# Altium PCB PCB1.PcbDoc
Units mm, origin at the board's own origin, x right, y up, seen from the top; angles counter-clockwise.
Board outline 62.23 x 101.6 mm, 2 copper layers (Top Layer, Bottom Layer); 56 components, 41 nets, 145 pads, 0 vias.
Unrouted connection lines stored in the file: 98.
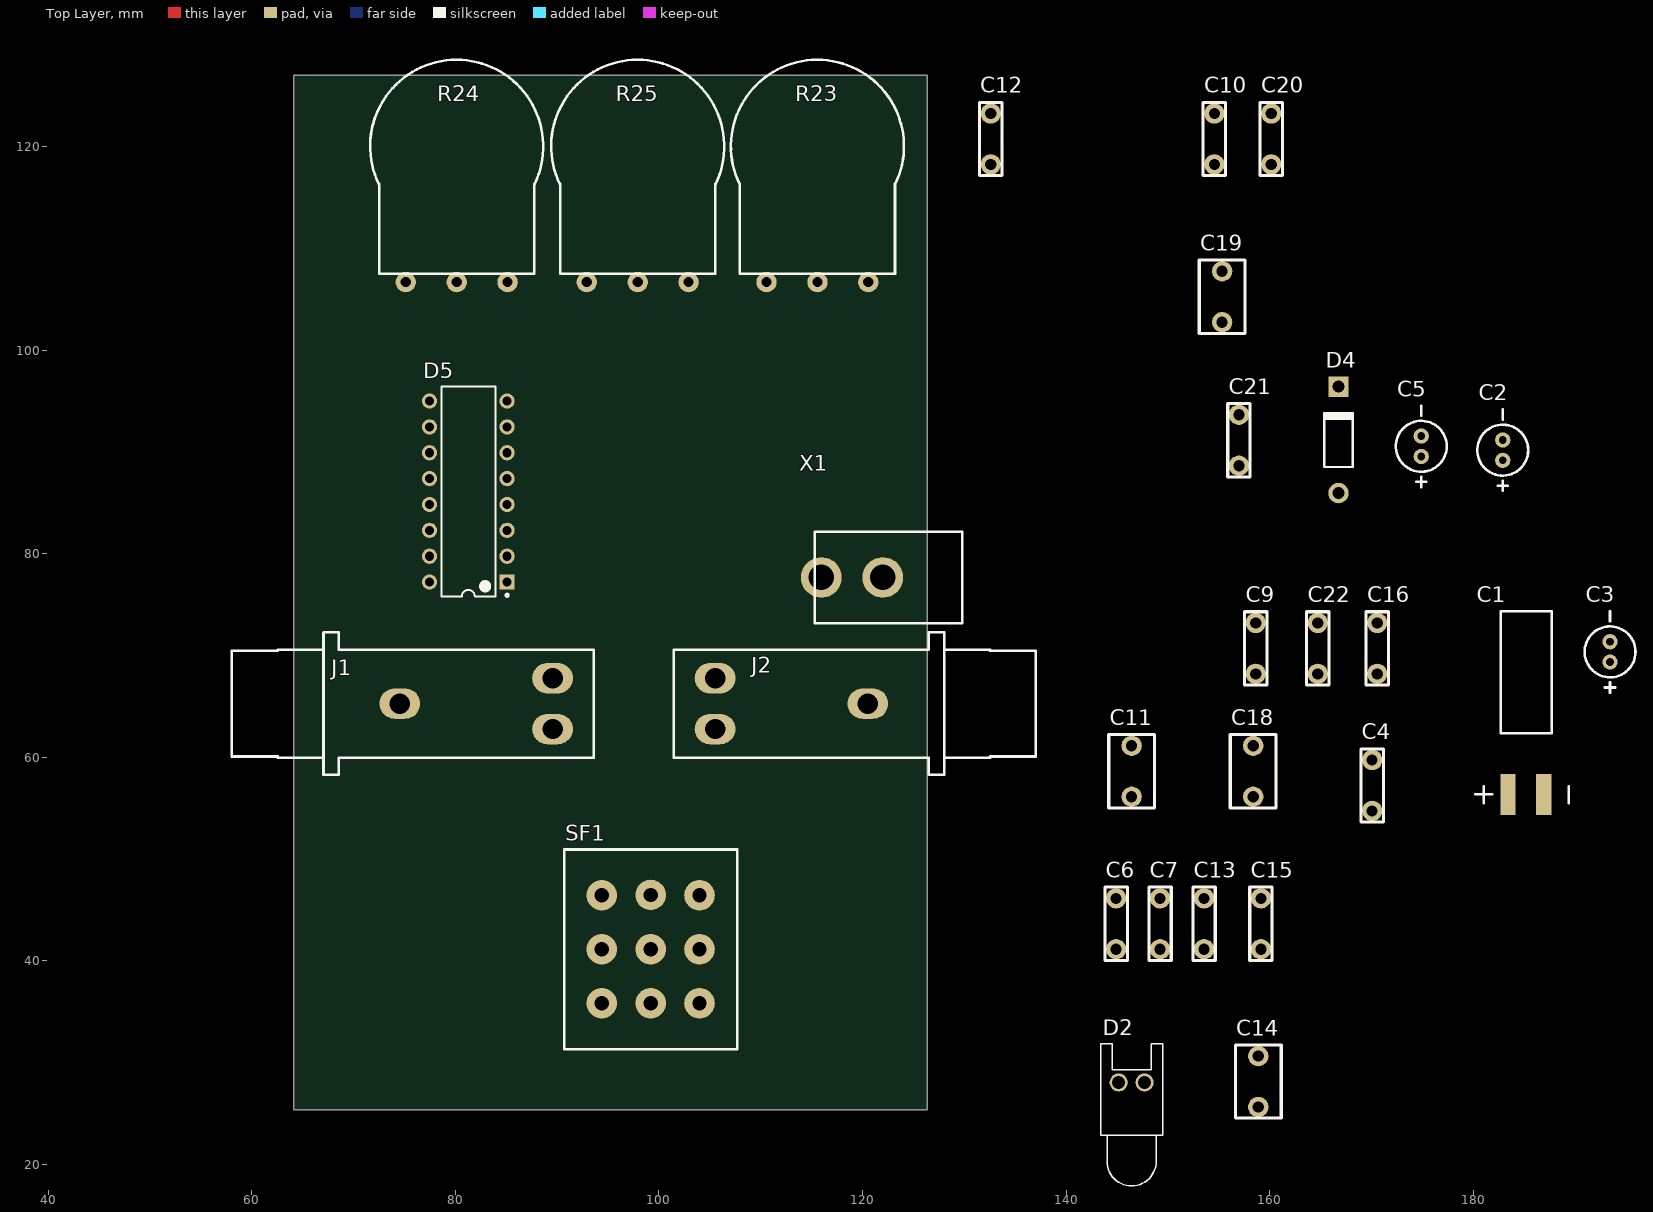
[diagram p0: Top Layer view]
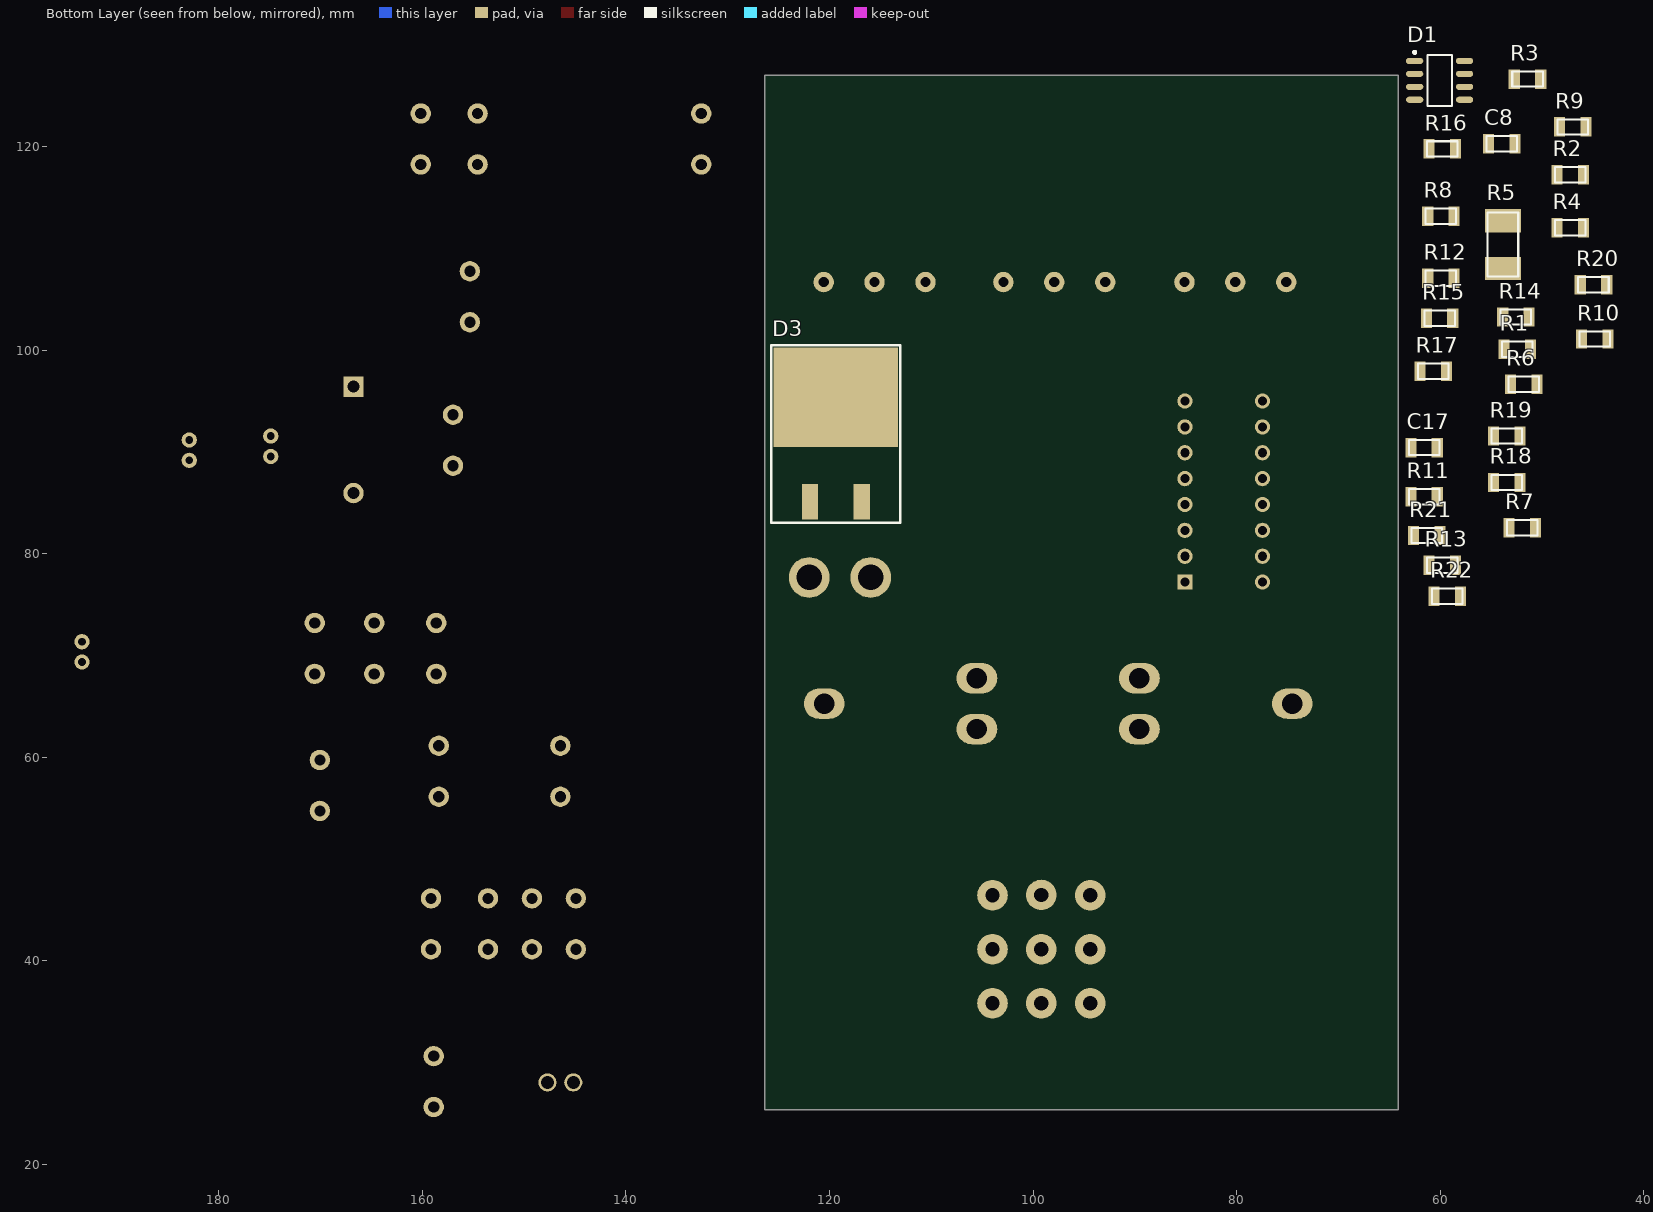
[diagram p1: Bottom Layer view, seen from below]

## Layer stack, top to bottom
Top Solder: solder mask 0.0102, Solder Resist, Dk 3.5
Top Layer: signal copper 0.0356
Dielectric 1: dielectric 0.32, FR-4, Dk 4.8
Bottom Layer: signal copper 0.0356
Bottom Solder: solder mask 0.0102, Solder Resist, Dk 3.5

## Board outline
64.135,25.4 126.365,25.4 126.365,127 64.135,127

## Design rules (kind name [scope] priority, off if disabled: settings)
Clearance [All] p1: gap=0.254
PolygonConnect [All] p1: connectstyle=Relief reliefconductorwidth=0.254 reliefentries=4 polygonreliefangle="90 Angle" airgapwidth=0.254
RoutingVias [All] p1: holewidth=0.711 width=1.27 viastyle="Through Hole" minholewidth=0.711 minwidth=1.27 maxholewidth=0.711 maxwidth=1.27
SolderMaskExpansion [All] p1: expansion=0.102
Width [All] p1: maxlimit=0.254 minlimit=0.254 preferedwidth=0.254
29 further rules are at their usual default settings.

## Components (designator, comment, footprint, x,y, rotation, side; value= is the part's Value field where it differs from the comment)
C1 "C15x8" C12x5 187.706,62.357 r90 top
C2 "C15x8" B41828_D5 182.88,90.17 r90 top
C3 "C15x8" B41828_D5 193.421,70.358 r90 top
C4 "C0603" "B32529C 3222" 170.053,54.737 r90 top
C5 "C15x8" B41828_D5 174.879,90.551 r90 top
C6 "C0603" "B32529C 3222" 144.907,41.148 r90 top
C7 "C0603" "B32529C 3222" 149.225,41.148 r90 top
C8 "C1206" C1206 53.975,120.269 r180 bottom
C9 "2.2n" "B32529C 3222" 158.623,68.199 r90 top
C10 "2.2n" "B32529C 3222" 154.559,118.237 r90 top
C11 "1uF" B32529_C0105 146.431,56.134 r90 top
C12 "C0603" "B32529C 3222" 132.588,118.237 r90 top
C13 "C0603" "B32529C 3222" 153.543,41.148 r90 top
C14 "1uF" B32529_C0105 158.877,25.654 r90 top
C15 "10n" "B32529C 3222" 159.131,41.148 r90 top
C16 "4.7n" "B32529C 3222" 170.561,68.199 r90 top
C17 "C1206" C1206 61.595,90.424 r180 bottom
C18 "1uF" B32529_C0105 158.369,56.134 r90 top
C19 "1uF" B32529_C0105 155.321,102.743 r90 top
C20 "10n" "B32529C 3222" 160.147,118.237 r90 top
C21 "47n" "B32529C 3222" 156.972,88.646 r90 top
C22 "C0603" "B32529C 3222" 164.719,68.199 r90 top
D1 "tl072" SO8_L 60.071,126.492 r180 bottom
D2 "LED0" LED-0 146.431,28.067 r0 top
D3 "L7805" D2PACK 119.38,95.377 r180 bottom
D4 "1N4007" DO-41 166.751,91.186 r90 top
D5 "PT2399" DIP-16 81.28,86.106 r180 top
J1 "ST-008G-04" ST-008G-04 67.056,65.278 r0 top
J2 "ST-008G-04" ST-008G-04 128.016,65.278 r180 top
R1 "R1206-0,25 W" R1206 52.451,100.076 r180 bottom
R2 "R1206-0,25 W" R1206 47.244,117.221 r180 bottom
R3 "R1206-0,25 W" R1206 51.435,126.619 r180 bottom
R4 "R1206-0,25 W" R1206 47.244,112.014 r180 bottom
R5 "R2512-1 W" R2512 53.848,110.363 r90 bottom
R6 "R1206-0,25 W" R1206 51.816,96.647 r180 bottom
R7 "R1206-0,25 W" R1206 51.943,82.55 r180 bottom
R8 "R1206-0,25 W" R1206 59.944,113.157 r180 bottom
R9 "R1206-0,25 W" R1206 46.99,121.92 r180 bottom
R10 "R1206-0,25 W" R1206 44.831,101.092 r180 bottom
R11 "R1206-0,25 W" R1206 61.595,85.598 r180 bottom
R12 "R1206-0,25 W" R1206 59.944,107.061 r180 bottom
R13 "R1206-0,25 W" R1206 59.817,78.867 r180 bottom
R14 "R1206-0,25 W" R1206 52.578,103.251 r180 bottom
R15 "R1206-0,25 W" R1206 60.071,103.124 r180 bottom
R16 "R1206-0,25 W" R1206 59.817,119.761 r180 bottom
R17 "R1206-0,25 W" R1206 60.706,97.917 r180 bottom
R18 "R1206-0,25 W" R1206 53.467,86.995 r180 bottom
R19 "R1206-0,25 W" R1206 53.467,91.567 r180 bottom
R20 "R1206-0,25 W" R1206 44.958,106.426 r180 bottom
R21 "R1206-0,25 W" R1206 61.341,81.788 r180 bottom
R22 "R1206-0,25 W" R1206 59.309,75.819 r180 bottom
R23 "50k" 16K1 115.57,120.015 r0 top
R24 "50k" 16K1 80.137,120.015 r0 top
R25 "50k" 16K1 97.917,120.015 r0 top
SF1 "SF-17020F-0302-21R-L" SF-17020F-0302-21R-L 99.187,41.148 r0 top
X1 "Comment" DS-201 129.794,82.169 r180 top

## Footprints (in the part's own frame and the unit in brackets; to place one, negate y for a bottom-side part, rotate by r counter-clockwise, add the part's x,y. Pads: shape width x height; smd on the part's side, far side on the other; paste and mask are expansions set on the pad)
16K1 [mm]
  round 2 hole 1: 1(-5,-13.335) 2(0,-13.335) 3(5,-13.335)
  silkscreen extent -8.5,-12.5 8.5,8.5, body extent -8.44,-16.5 8.44,8.45, height 21.3
B32529_C0105 [mm]
  round 2 hole 1.1: 1(0,0) 2(5,0)
  silkscreen extent -1.1,-2.25 6.1,2.25, body extent -0.5,-0.5 5.5,0.5, height 3
"B32529C 3222" [mm]
  round 2 hole 1.1: 1(0,0) 2(5,0)
  silkscreen extent -1.1,-1.1 6.1,1.1, body extent -1.25,-1.25 6.25,1.25, height 6.5
B41828_D5 [mm]
  round 1.5 hole 0.762: 1(-1,0) 2(1,0)
  silkscreen extent -4,-2.5 4,2.5
C12x5 [mm]
  rect 4x1.5 smd: 1(-6,4.3) 2(-6,0.8)
  silkscreen extent -6.85,-1.65 12,7.5
C1206 [mm]
  rect 1.1x1.9 smd: 1(-1.3,0) 2(1.3,0)
  silkscreen extent -1.5,-0.75 1.5,0.75, body extent -1.61,-0.86 1.61,0.86, height 1.5
D2PACK [mm]
  rect 12.2x9.75 smd: 0(0,0)
  rect 1.6x3.5 smd: 1(-2.54,-10.275) 2(2.54,-10.257)
  silkscreen extent -6.35,-12.32 6.35,5.08
DIP-16 [mm] "DIP, 16-Pin, Row Spacing 7.62 mm, Pitch 2.54 mm"
  rect 1.5x1.5 hole 0.9: 1(-3.81,8.89)
  round 1.5 hole 0.9: 2(-3.81,6.35) 3(-3.81,3.81) 4(-3.81,1.27) 5(-3.81,-1.27) 6(-3.81,-3.81) 7(-3.81,-6.35) 8(-3.81,-8.89) 9(3.81,-8.89) 10(3.81,-6.35) 11(3.81,-3.81) 12(3.81,-1.27) 13(3.81,1.27) 14(3.81,3.81) 15(3.81,6.35) 16(3.81,8.89)
  silkscreen extent -3.94,-10.3 2.65,10.31, body extent -3.6,-10.28 3.6,10.28, height 5.08
DO-41 [mm] "Diode, Axial; Body 5.2 x 2.7 mm (LxDia. max), Lead Dia. 0.86 mm (max)"
  round 2 hole 1.2: 1(-5.23,0)
  rect 2x2 hole 1.2: 2(5.23,0)
  silkscreen extent -2.65,-1.4 2.75,1.4
DS-201 [mm]
  round 4 hole 2.5: 1(7.8,4.5) 2(13.843,4.5)
  silkscreen extent 0,0 14.5,9, body extent 0,0 14.5,9, height 11
LED-0 [mil] "LED; 2 Leads"
  round 70 hole 50: 1(50,0) 2(-50,0)
  silkscreen extent -120,-400 120,150
R1206 [mm]
  rect 1.1x1.9 smd: 1(-1.3,0) 2(1.3,0)
  silkscreen extent -1.5,-0.75 1.5,0.75, body extent -1.61,-0.86 1.61,0.86, height 0.6
R2512 [mm]
  rect 2.3x3.5 smd: 1(-2.35,0) 2(2.35,0)
  silkscreen extent -3.15,-1.5 3.15,1.5, body extent -3.26,-1.61 3.26,1.61, height 0.6
SF-17020F-0302-21R-L [mm]
  round 3 hole 1.4: 1.1(-4.8,-5.3) 1.2(0,-5.3) 1.3(4.8,-5.3) 2.1(-4.8,0) 2.2(0,0) 2.3(4.8,0) 3.1(-4.8,5.3) 3.2(0,5.334) 3.3(4.8,5.3)
  silkscreen extent -8.5,-9.8 8.5,9.8, body extent -8.5,-9.8 8.5,9.8, height 16.7
SO8_L [mm] "8-Pin Small Outline Package (SO8), IPC High Density"
  oval 1.7x0.6 smd: 1(-2.45,1.905) 2(-2.45,0.635) 3(-2.45,-0.635) 4(-2.45,-1.905) 5(2.45,-1.905) 6(2.45,-0.635) 7(2.45,0.635) 8(2.45,1.905)
  silkscreen extent -2.58,-2.5 1.2,2.88, body extent -2,-2.5 2,2.5, height 1.73
ST-008G-04 [mm]
  oval 4x3 hole 2: 1(7.5,0) 2(22.5,-2.5) 3(22.5,2.5)
  silkscreen extent -9,-7 26.54,7, body extent -9,-7 26.54,7, height 10.6

## Part data
C1: library part "Condensator C12x8"
C2 C3 C5: library part "Condensator B41851"
C4 C22: library part "Condensator C22n"
C6 C7 C12 C13: library part "Condensator C100n"
C8 C17: library part "Condensator 1206 100"
C9 C10: library part "Condensator C2.2n"
C11 C14 C18 C19: library part "Condensator 1u"
C15 C20: library part "Condensator C10n"
C16: library part "Condensator C4.7n"
C21: library part "Condensator C47n"
D2: "Typical INFRARED GaAs LED"
D4: library part "Diode 1N4007", "1 Amp General Purpose Rectifier"
R1 R2 R3: library part "Resistor 1206 1.5k"
R4 R7 R8 R9 R10 R16 R18 R19 R20 R22: library part "Resistor 1206 300"
R5: library part "Resistor 2506 33"
R6 R11 R12 R13 R14 R15 R17 R21: library part "Resistor 1206 10k"
R23 R24 R25: library part "Resistor 16K1"
SF1: library part SF-17020F

## Nets (pads, with @x,y where several pads share a name; then routed paths per layer and width w, separated by ;. In a path a pad name is that pad's centre, name@x,y a point inside that pad or via, vN(x,y) a via of type N, cw(c..) or ccw(c..) an arc to the next point about the centre after c; other vN are vias at no path point)
1/2: C3.1 D1.3 D1.5 R2.1 R3.2
9V: C1.1 D1.8 D3.1 D4.2 R1.1 R2.2 R5.1
GND: C1.2 C2.2 C3.2 C5.2 C6.1 C7.1 C15.1 C16.2 C20.1 C21.1 D1.4 D3.0 D4.1 D5.3 D5.4 J1.3 J2.3 R3.1 R4.1 R22.1 R23.1 R24.3 R25.1 SF1.3.2 X1.1
NetC2_1: C2.1 D3.2 D5.1
NetC4_1: C4.1 R4.2 SF1.1.1
NetC4_2: C4.2 R7.1
NetC5_1: C5.1 D5.2
NetC6_2: C6.2 D5.7
NetC7_2: C7.2 D5.8
NetC8_1: C8.1 D1.2 R7.2 R8.1
NetC8_2: C8.2 C11.2 D1.1 R8.2 R10.1
NetC9_1: C9.1 D5.16 R11.1
NetC9_2: C9.2 D5.15 R13.1
NetC10_1: C10.1 D5.14 R12.1 R17.1
NetC10_2: C10.2 D5.13 R14.1
NetC11_1: C11.1 R9.2
NetC12_1: C12.1 D5.12 R15.1
NetC12_2: C12.2 D5.11
NetC13_1: C13.1 D5.10
NetC13_2: C13.2 D5.9
NetC14_1: C14.1 R24.2
NetC14_2: C14.2 R16.1
NetC15_2: C15.2 R15.2
NetC16_1: C16.1 R9.1 R11.2 R13.2 R21.1
NetC17_1: C17.1 D1.6 R10.2 R16.2 R18.1
NetC17_2: C17.2 C18.2 D1.7 R18.2
NetC18_1: C18.1 R20.1
NetC19_1: C19.1 C20.2 R17.2
NetC19_2: C19.2 R19.1 R24.1
NetC21_2: C21.2 R19.2 R25.2
NetC22_1: C22.1 R21.2
NetC22_2: C22.2 R25.3
NetD2_1: D2.1 R1.2
NetD2_2: D2.2 SF1.3.1
NetD5_6: D5.6 R6.2
NetJ1_2: J1.2 SF1.1.2
NetJ2_2: J2.2 SF1.2.2
NetR5_2: R5.2 X1.2
NetR6_1: R6.1 R23.2 R23.3
NetR20_2: R20.2 R22.2 SF1.2.1
NetSF1_1.3: SF1.1.3 SF1.2.3
pads on no net: D5.5 J1.1 J2.1 R12.2 R14.2 SF1.3.3